# Altium PCB tuch-tara3.PcbDoc
Units mm, origin at the board's own origin, x right, y up, seen from the top; angles counter-clockwise.
Board outline 151 x 86.38 mm, 2 copper layers (Top Layer, Bottom Layer); 37 components, 22 nets, 99 pads, 9 vias.
Unrouted connection lines stored in the file: 8.
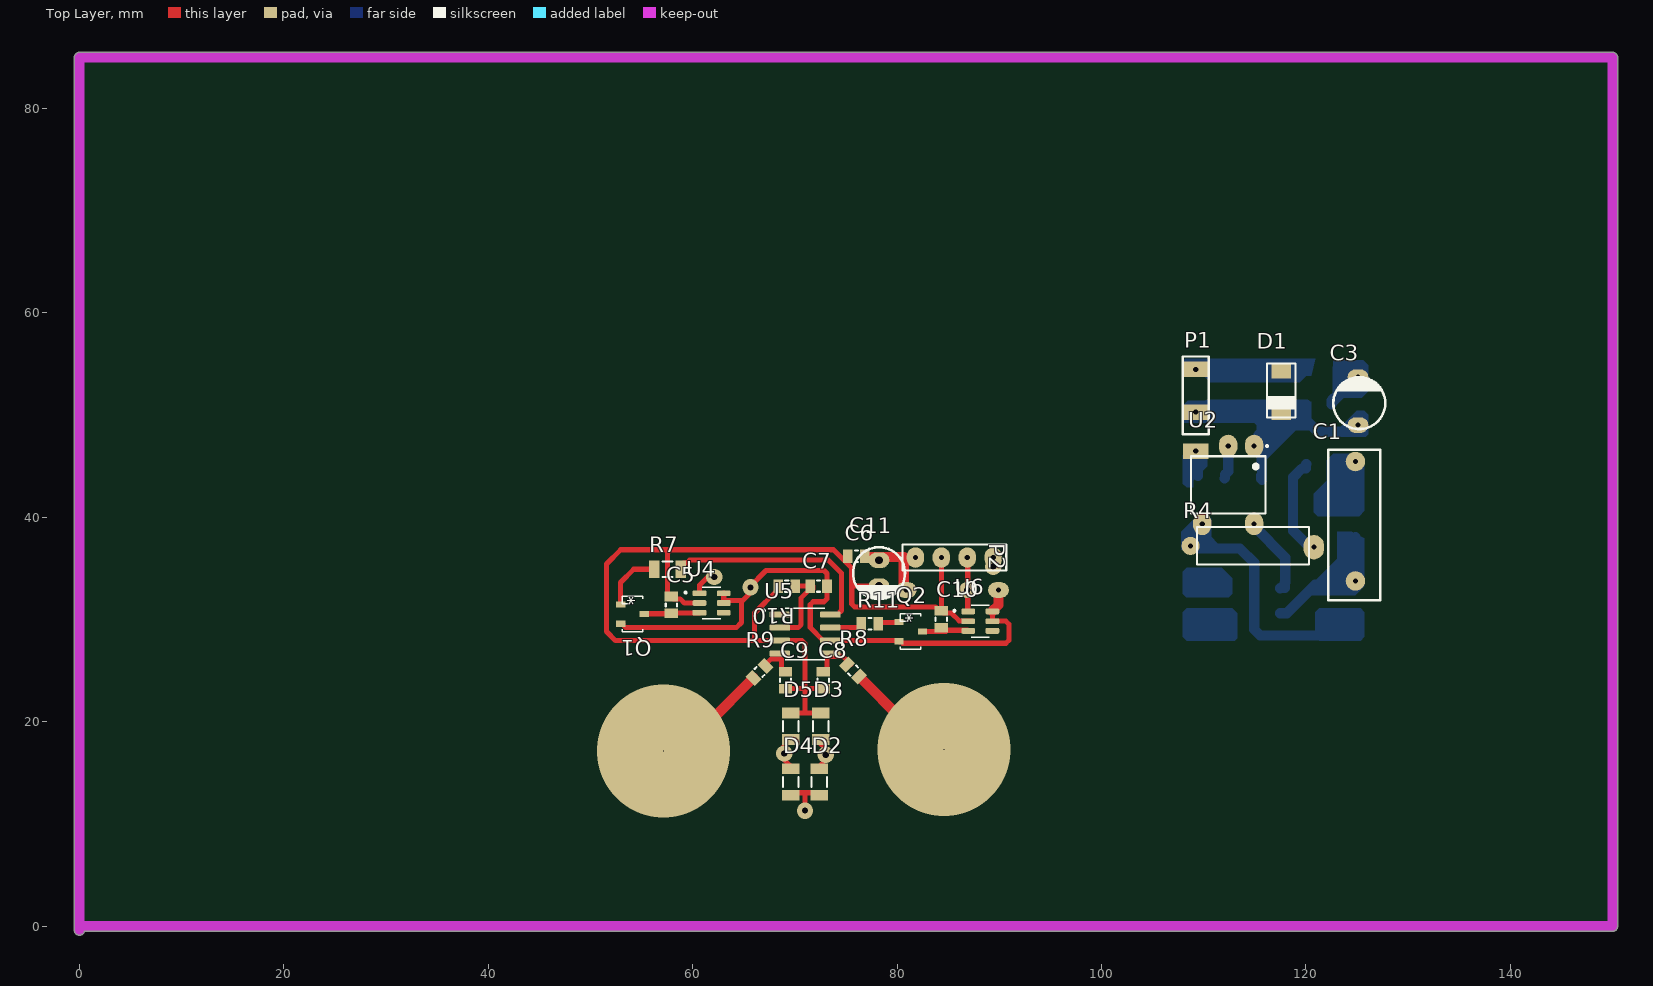
[diagram p0: Top Layer view]
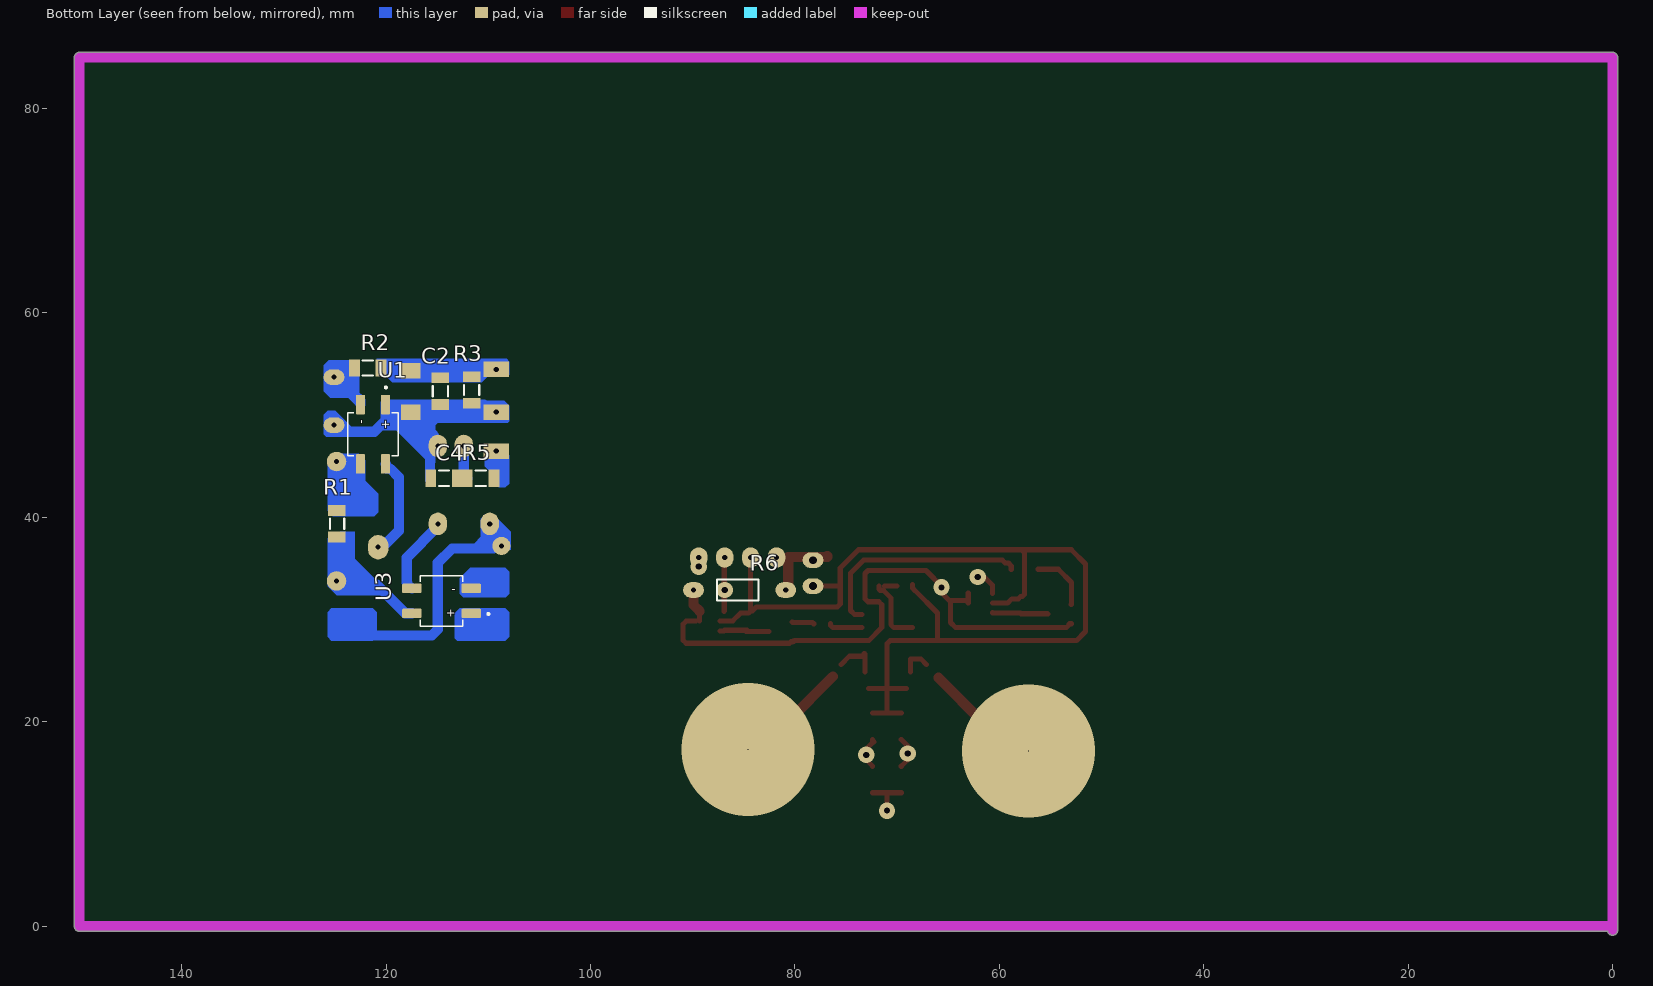
[diagram p1: Bottom Layer view, seen from below]
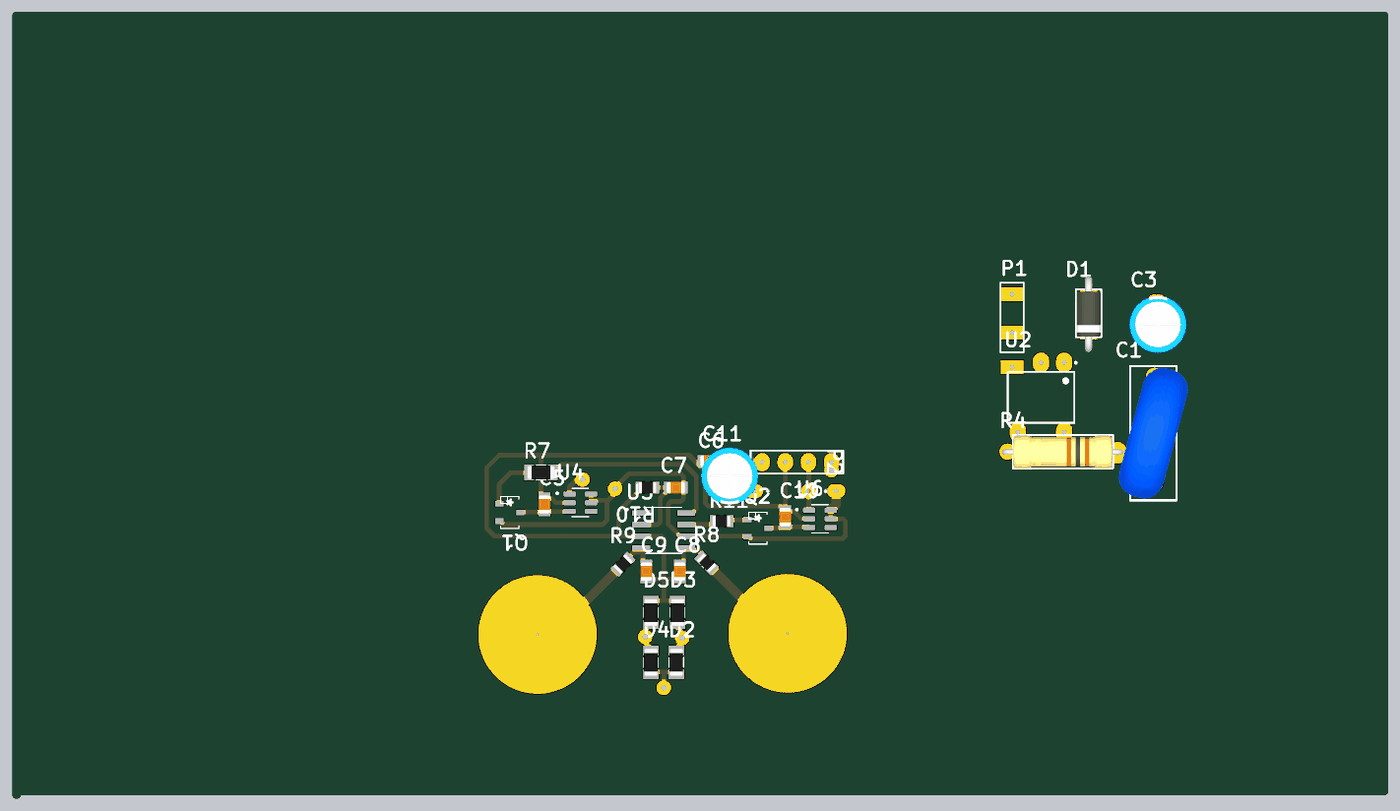
[diagram p2: 3D render of the assembled board from above, using the file's embedded part models]
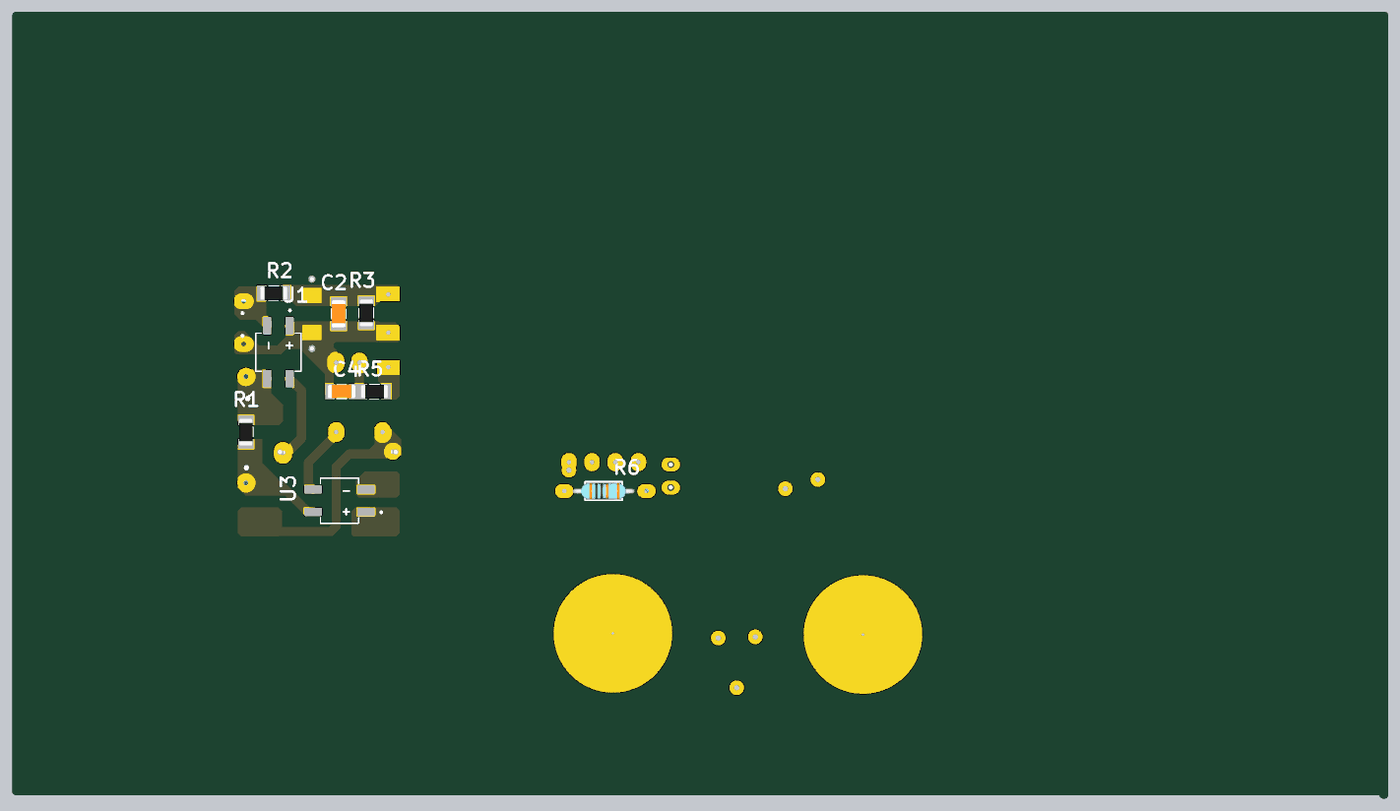
[diagram p3: 3D render of the assembled board from below, using the file's embedded part models]

## Layer stack, top to bottom
Top Solder: solder mask 0.0102, Solder Resist, Dk 3.5
Top Layer: signal copper 0.0356
Dielectric 1: dielectric 0.32, FR-4, Dk 4.8
Bottom Layer: signal copper 0.0356
Bottom Solder: solder mask 0.0102, Solder Resist, Dk 3.5

## Board outline
-0.5,-0.381 -0.5,85 cw(c0,85) 0,85.5 150,85.5 cw(c150,85) 150.5,85 150.5,0 cw(c150,0) 150,-0.5 0.486,-0.5 cw(c0,-0.381)

## Design rules (kind name [scope] priority, off if disabled: settings)
Clearance Clearance_1 [InPolygon] p1: gap=0.8 ignorepadtopadclearanceinfootprint=FALSE
Clearance [All] p2: gap=0.254 ignorepadtopadclearanceinfootprint=FALSE except(0: Arc-Hole Track-Hole SMDPad-Hole THPad-Hole Via-Hole Fill-Hole Poly-Hole Region-Hole Text-Hole)
PolygonConnect [All] p1: connectstyle=Relief reliefconductorwidth=0.254 reliefentries=4 polygonreliefangle="90 Angle" airgapwidth=0.254
RoomDefinition tuch-tara3 [InComponentClass('tuch-tara3')] p1: confinementstyle=ConfineIn formatcopy=TRUE lockcomponents=FALSE outline 144.907,-4.953 247.904,-4.953 247.904,23.114 144.907,23.114
RoutingLayers [All] p1: top layer_v5=FALSE bottom layer_v5=TRUE
RoutingVias [All] p1: holewidth=0.711 width=2.5 viastyle="Through Hole" minholewidth=0.711 minwidth=1.27 maxholewidth=0.711 maxwidth=2
SolderMaskExpansion [All] p1: expansion=0.102 istentingtop=FALSE
Width [All] p1: maxlimit=3 minlimit=0.5 preferedwidth=1
29 further rules are at their usual default settings.

## Components (designator, comment, footprint, x,y, rotation, side; value= is the part's Value field where it differs from the comment)
C1 "=Value" CAP-30 124.714,39.243 r90 top
C2 "=Value" "CAP 1206" 114.681,52.324 r90 bottom
C3 "=Value" ELEC-CAP-RAD10-20#1 125.222,51.181 r270 top
C4 "=Value" "CAP 1206" 114.3,43.815 r0 bottom
C5 "Cap Semi" "CAP 0805" 57.912,31.496 r90 top value=100pF
C6 "Cap Semi" "CAP 0805" 76.073,36.195 r0 top value=100pF
C7 "=Value" "CAP 0805" 72.39,33.274 r0 top
C8 "=Value" "CAP 0805" 72.771,24.003 r270 top
C9 "=Value" "CAP 0805" 69.088,24.003 r270 top
C10 "Cap Semi" "CAP 0805" 84.328,30.099 r90 top value=100pF
C11 "=Value" ELEC-CAP-RAD10-20#2 78.232,34.544 r90 top
D1 "MODEL" DO-41 117.602,56.134 r270 top
D2 "MODEL" "RES 1206 (3216X08L)" 72.39,14.097 r90 top
D3 "MODEL" "RES 1206 (3216X08L)" 72.517,19.558 r90 top
D4 "MODEL" "RES 1206 (3216X08L)" 69.596,14.097 r90 top
D5 "MODEL" "RES 1206 (3216X08L)" 69.596,19.558 r90 top
P1 "Header 3" HDR1X3 109.22,54.483 r270 top
P2 "Header 4" HDR1X4 81.788,36.068 r0 top
Q1 "2N3906" SOT23-3 54.109,31.811 r270 top
Q2 "2N3906" SOT23-3 81.332,30.099 r270 top
R1 "10K" "RES 1206 (3216X08L)" 124.841,39.37 r270 bottom
R2 "10K" "RES 1206 (3216X08L)" 121.793,54.61 r180 bottom
R3 "10K" "RES 1206 (3216X08L)" 111.633,52.451 r90 bottom
R4 "10K" Res-(1/1) 121.158,37.211 r180 top
R5 "10K" "RES 1206 (3216X08L)" 110.744,43.815 r0 bottom
R6 "10K" Res-(1/4) 85.598,32.893 r180 bottom
R7 "10K" "RES 1206 (3216X08L)" 57.531,34.925 r180 top
R8 "10K" "RES 0805 (2012X06L)" 75.692,25.019 r135 top
R9 "10K" "RES 0805 (2012X06L)" 66.548,24.892 r45 top
R10 "10K" "RES 0805 (2012X06L)" 69.215,33.274 r0 top
R11 "10K" "RES 0805 (2012X06L)" 77.343,29.591 r0 top
U1 "MB6S" SOIC245P670X270-4N 121.285,48.133 r270 bottom
U2 "K3021P" DIP762W50P254L730H410Q6 112.395,43.18 r270 top
U3 "MB6S" SOIC245P670X270-4N 114.575,31.832 r0 bottom
U4 "TTP223_" SOT95P285X126-6N 61.849,31.623 r0 top
U5 "LM555CM/NOPB" SOIC127P599X175-8N 70.993,28.575 r0 top
U6 "TTP223_" SOT95P285X126-6N 88.138,29.845 r0 top

## Footprints (in the part's own frame and the unit in brackets; to place one, negate y for a bottom-side part, rotate by r counter-clockwise, add the part's x,y. Pads: shape width x height; smd on the part's side, far side on the other; paste and mask are expansions set on the pad)
"CAP 0805" [mm]
  rect 0.95x1.3 smd: 1(-0.889,0) 2(0.761,0)
  silkscreen extent -0.21,-0.55 0.09,0.55, body extent -1.08,-0.63 0.95,0.63, height 0.65
"CAP 1206" [mm]
  rect 1.05x1.7 smd: 1(-1.27,0) 2(1.326,0)
  silkscreen extent -0.47,-0.75 0.53,0.75, body extent -1.49,-0.77 1.55,0.75, height 0.75
CAP-30 [mil]
  round 75 hole 19.68: 1(-215,-5) 2(245,-5)
  silkscreen extent -290,-100 290,100, body extent -301,-169 301,169, height 707
DIP762W50P254L730H410Q6 [mm]
  oval 2.2x1.79 hole 0.5: 1(-3.81,2.54) 2(-3.81,0) 4(3.81,-2.54) 6(3.81,2.54)
  silkscreen extent -3.9,-3.65 2.8,3.9
DO-41 [mm]
  rect 1.5x1.905 all layers, no hole: 1(1.778,0) 2(5.842,0)
  silkscreen extent 1.1,-1.5 6.35,1.5, body extent -0.41,-1.33 8,1.33, height 3.33
ELEC-CAP-RAD10-20#1 [mil]
  oval 60x80 hole 19.68: 1(-100,-5) 2(84.65,-5)
  silkscreen extent -100,-100 100,100, body extent -124,-124 124,124, height 404
ELEC-CAP-RAD10-20#2 [mil]
  oval 60x80 hole 30: 1(-50,0) 2(50,0)
  silkscreen extent -100,-100 100,100, body extent -124,-124 124,124, height 404
HDR1X3 [mm] "Connector; Header; 3 Position"
  rect 1.524x2.5 hole 0.5: 1(0,0) 2(8.001,0) 3(4.191,0)
  silkscreen extent -1.27,-1.27 6.35,1.27
HDR1X4 [mm] "Connector; Header; 4 Position"
  oval 1.7x2 hole 0.5: 1(0,0) 2(2.54,0) 3(5.08,0) 4(7.62,0)
  silkscreen extent -1.27,-1.27 8.89,1.27
"RES 0805 (2012X06L)" [mm] "Chip Resistor, 2-Leads, Body 2.0x1.3mm, IPC High Density _ (0.100 W)"
  rect 0.95x1.3 smd: 1(-0.838,0) 2(0.812,0)
  silkscreen extent -0.16,-0.55 0.14,0.55, body extent -1.03,-0.63 1,0.64, height 0.6
"RES 1206 (3216X08L)" [mm] "Chip Resistor, 2-Leads, Body 3.2x1.6mm, IPC High Density _ (0.125 W)"
  rect 1.05x1.7 smd: 1(-1.295,0) 2(1.301,0)
  silkscreen extent -0.5,-0.75 0.5,0.75, body extent -1.52,-0.76 1.53,0.76, height 0.6
Res-(1/1) [mil]
  oval 78.74x94.49 hole 19.68: 1(15,5)
  round 70 hole 19.68: 2(490,0)
  silkscreen extent 34,-72 466,72, body extent -11,-71 514,73, height 151
Res-(1/4) [mil]
  oval 80x60 hole 19.68: 1(-170,0) 2(185,0)
  silkscreen extent -80,-40 80,40, body extent -135,-36 135,36, height 115
SOIC127P599X175-8N [mm]
  rrect25% 1.97x0.6 smd: 1(-2.47,1.905) 2(-2.47,0.635) 3(-2.47,-0.635) 4(-2.47,-1.905) 5(2.47,-1.905) 6(2.47,-0.635) 7(2.47,0.635) 8(2.47,1.905)
  silkscreen extent -4.14,-2.52 1.95,2.52
SOIC245P670X270-4N [mm]
  rrect23% 1.91x0.91 smd: 1(-2.9,1.225) 2(-2.9,-1.225) 3(2.9,-1.225) 4(2.9,1.225)
  silkscreen extent -4.68,-2.48 2.1,2.48
SOT23-3 [mm]
  rect 0.6x0.9 smd: 1(0.32,-1.15) 2(2.22,-1.15) 3(1.27,1.15)
  silkscreen extent -0.48,-1 3.02,1
SOT95P285X126-6N [mm]
  rrect50% 1.35x0.57 smd: 1(-1.185,0.95) 2(-1.185,0) 3(-1.185,-0.95) 4(1.185,-0.95) 5(1.185,0) 6(1.185,0.95)
  silkscreen extent -2.64,-1.56 0.9,1.56

## Part data
C1 C2 C4 C7 C8 C9: library part Capacitor, "Capacitor"
C3 C11: library part "Capacitor Electrolytic", "Electrolytic Capacitor"
C5 C6 C10: "Capacitor (Semiconductor SIM Model)", LatestRevisionDate=29-May-2009, LatestRevisionNote="IPC-7351 Footprint Added.", PackageDescription="Chip Capacitor", PackageReference=C1206, Published=8-Jun-2000, Publisher="Altium Limited"
D1: library part Diode, "Diode", MODEL=1N4148
D2 D3 D4 D5: library part "LED 5mm", "Typical LED", COLOR=RED
P1: "Header, 3-Pin", LatestRevisionDate=17-Jul-2002, LatestRevisionNote="Re-released for DXP Platform.", Publisher="Altium Limited"
P2: "Header, 4-Pin", LatestRevisionDate=17-Jul-2002, LatestRevisionNote="Re-released for DXP Platform.", Publisher="Altium Limited"
Q1 Q2: "PNP General Purpose Amplifier", ComponentLink1Description="Manufacturer Link", ComponentLink1URL=http://www.fairchildsemi.com/, ComponentLink2Description=Datasheet, ComponentLink2URL=http://www.fairchildsemi.com/ds/2N%2F2N3906.pdf, DatasheetVersion=1997, LatestRevisionDate=15-Jan-2003, LatestRevisionNote="PCB Footprint 'BCY-W3/D4.7' replaced", PackageDescription="TO, Flat Index; 3 In-Line, Axial Leads; Body Dia. 4.5mm; Leads 0.51 x 0.48 mm (max)", PackageReference=TO-92A, PackageVersion=Sep-1998, Published=8-Jun-2000, Publisher="Altium Limited"
R1 R2 R3 R4 R5 R6 R7 R8 R9 R10 R11: library part Resistor, "Resistor", Power="1/4 W", Tolerance=5%
U1 U3: "Bridge Rectifier Single Phase Standard 600V Surface Mount 4-SOIC", Package="BESOP-4 Surge Components", Digi-Key_Part_Number=MB6SCT-ND, Digi-Key_Purchase_URL=https://www.digikey.com.tr/product-detail/en/on-semiconductor/MB6S/MB6SCT-ND/965654?utm_source=snapeda&utm_medium=aggregator&utm_campaign=symbol, MF="ON Semiconductor", MP=MB6S, SnapEDA_Link=https://www.snapeda.com/parts/MB6S/ON%20Semiconductor/view-part/2774209/?ref=snap
U2: "Optoisolator Triac Output 5300Vrms 1 Channel 6-DIP", Package="DIP-6 Vishay", Availability=Unavailable, DigiKey-Purchase-URL=https://snapeda.com/shop?store=DigiKey&id=291595, MF="Vishay Semiconductor", Mouser-Purchase-URL=https://snapeda.com/shop?store=Mouser&id=291595, MP=K3021P, Price=None, SnapEDA_Link=https://www.snapeda.com/parts/K3021P/Vishay%20Semiconductor%20Opto%20Division/view-part/291595/?ref=snap
U4 U6: "22 kOhms Â±5% 0.1W, 1/10W Chip Resistor 0402 _1005 Metric_ Automotive AEC-Q200, Moisture Resistant Thick Film", Package="0402 KOA Speer", Availability=Unavailable, MF="KOA Speer", MP=TTP223, Price=None, SnapEDA_Link=https://www.snapeda.com/parts/TTP223%20/KOA%20Speer/view-part/2780209/?ref=snap
U5: "Highly Stable 555 Timer 8-SOIC 0 to 70", Package=None, Availability=Unavailable, MP=LM555CM/NOPB, Price=None

## Via types
v1: diameter 1.6, hole 0.6, Top Layer to Bottom Layer, 7 vias
v2: diameter 13, hole 0, Top Layer to Bottom Layer, 2 vias

## Nets (pads, with @x,y where several pads share a name; then routed paths per layer and width w, separated by ;. In a path a pad name is that pad's centre, name@x,y a point inside that pad or via, vN(x,y) a via of type N, cw(c..) or ccw(c..) an arc to the next point about the centre after c; other vN are vias at no path point)
faz: R4.2 U2.4 | length 25.5
  Bottom Layer w1: R4.2 108.861,37.062 109.411,37.062 109.516,36.957 113.538,36.957 114.935,35.56 114.935,29.034 115.521,28.448 124.956,28.448 ; R4.2@108.861,37.957 109.855,38.951 U2.4
GND: C2.2 C5.2 C6.1 C8.2 C9.2 C10.2 C11.1 D1.1 D3.2 D5.2 P1.1 P2.2 R2.2 R3.2 R10.1 U4.2 U5.3 U6.2 | length 115.7
  Top Layer w0.5: U4.2 59.182,31.623 58.773,32.032 58.137,32.032 C5.2 57.756,32.257 57.531,32.482 57.531,36.537 57.824,36.83 ; R10.1@68.498,33.446 68.498,33.094 68.279,32.874 66.04,30.635 66.04,27.94 ; C9.2 70.929,23.242 ; D5.2 70.993,20.859 ; D3.2@72.39,20.859 70.993,20.859 ; C8.2 70.993,23.242 ; C11.1 75.565,33.274 ; P2.2 84.328,31.035 C10.2@84.153,30.86 ; U6.2@87.334,29.845 87.299,29.88 86.071,29.88 85.302,30.649 84.539,30.649 C10.2 C10.2@84.153,30.86 ; 57.824,36.83 58.166,36.83 73.787,36.83 75.565,35.052 75.565,33.274 ; 57.824,36.83 52.959,36.83 51.562,35.433 51.562,28.829 52.451,27.94 66.04,27.94 ; 66.04,27.94 U5.3 70.7,27.94 70.993,27.647 70.993,23.242 ; 70.993,20.859 70.993,23.242 ; 75.565,33.274 75.565,31.535 75.858,31.242 83.771,31.242 C10.2@84.153,30.86
  Bottom Layer w1: P1.1@109.22,54.61 112.395,54.61 ; R3.2 119.149,53.752 120.134,54.737 R2.2@120.138,54.733 ; D1.1@117.475,54.737 D1.1@117.602,54.737
NetC1_2: C1.2 R1.1 U1.3 | length 7.3
  Bottom Layer w1: U1.3 122.51,45.304 122.555,45.35 124.725,45.35 C1.2 R1.1
NetC3_1: C3.1 R2.1 U1.2 | length 6.4
  Bottom Layer w1: U1.2 122.51,51.443 123.088,52.021 R2.1 123.088,54.285 123.113,54.26 123.438,54.26 123.877,53.821 124.995,53.821 C3.1
NetC4_1: C4.1 R5.2 U2.2 | length 3.3
  Bottom Layer w1: R5.2 112.07,43.84 112.07,44.165 112.395,44.49 U2.2
NetC5_1: C5.1 Q1.3 U4.3 | length 5.5
  Top Layer w0.5: Q1.3 55.292,30.574 57.879,30.574 C5.1 57.945,30.64 60.631,30.64 U4.3
NetC6_2: C6.2 C11.2 P2.1 R6.2 | length 7.5
  Top Layer w1: C6.2 76.834,36.157 76.859,36.131 80.645,36.131 80.645,33.135 80.887,32.893 R6.2
  Bottom Layer w1: R6.2@80.899,32.639 R6.2
NetC7_1: C7.1 R10.2 U5.2 | length 7.9
  Top Layer w0.5: U5.2 70.319,29.21 70.612,29.503 70.612,32.131 71.355,32.874 71.657,32.874 71.761,32.978 C7.1@71.761,33.28 ; R10.2 C7.1@71.247,33.274
NetC8_1: C8.1 R8.2 U5.5 | length 4.5
  Top Layer w0.5: C8.1@73.152,24.892 U5.5@73.152,26.416 ; U5.5@73.209,26.67 73.202,26.67 73.152,26.62 U5.5@73.152,26.416 ; R8.2@75.499,25.593 74.676,26.416 U5.5@73.152,26.416
NetC9_1: C9.1 R9.2 U5.4 | length 3.1
  Top Layer w0.5: R9.2@67.122,25.593 67.691,26.162 68.707,26.162 C9.1@68.707,24.892
NetC10_1: C10.1 Q2.3 U6.3 | length 4.9
  Top Layer w0.5: Q2.3@82.557,28.829 C10.1@84.764,28.829 ; C10.1@84.709,28.956 86.883,28.956 86.944,28.895 U6.3@87.334,28.895
NetQ1_2: Q1.1 R7.2 | length 6
  Top Layer w0.5: 52.928,33.624 52.944,33.64 ; Q1.1 52.944,31.506 52.944,33.64 ; R7.2 54.229,34.925 52.944,33.64
NetQ2_2: Q2.1 R11.2 | length 2.2
  Top Layer w0.5: R11.2 78.293,29.729 80.207,29.729 Q2.1@80.257,29.779
NetR4_1: R4.1 U1.4 | length 10.4
  Bottom Layer w1: U1.4 120.015,45.188 120.015,44.778 119.605,44.778 118.745,43.918 118.745,38.692 120.777,36.66 R4.1@120.777,36.449
NetR7_1: R7.1 U5.8 | length 21.7
  Top Layer w0.5: R7.1 58.826,35.25 59.101,35.525 59.426,35.525 59.715,35.814 73.279,35.814 74.549,34.544 74.549,30.881 74.148,30.48 U5.8
NetR11_1: R11.1 U5.7 | length 3.3
  Top Layer w0.5: U5.7 76.28,29.21 76.505,29.435 R11.1
NetU2_6: U2.6 U3.3 | length 8
  Bottom Layer w1: U2.6 114.935,39.116 117.983,36.068 117.983,33.643 117.93,33.59 117.93,33.102 117.52,33.102 U3.3
nol: C1.1 R1.2 U3.4 | length 13
  Bottom Layer w1: U3.4 117.486,30.618 118.121,30.618 120.904,33.401 123.82,33.401 124.028,33.609 124.668,33.609 C1.1 R1.2
o1: D2.2 D3.1 P1.2 P2.4 R5.1 U4.1 | length 8.4
  Top Layer w0.5: U4.1 60.664,33.359 61.468,34.163 v1(62.103,34.163) ; D2.2@72.39,15.652 73.025,16.287 v1(73.025,16.764) 73.025,17.353 72.344,18.034 72.263,18.034 72.39,18.161 D3.1@72.39,18.263
  Bottom Layer w1: P1.2 109.22,44.623 109.449,44.394 R5.1@109.449,44.069
  other v1: 89.408,35.179
o2: D4.2 D5.1 P2.3 U3.1 U6.1 | length 8.4
  Top Layer w0.5: D4.2@69.596,15.652 68.961,16.287 v1(68.961,16.891) 68.961,17.628 D5.1 ; P2.3 86.91,36.026 86.91,30.83 86.946,30.795 U6.1
  other v1: 86.868,32.893
oo1: U3.2
VCC: C2.1 C3.2 C4.2 C7.2 D1.2 D2.1 D4.1 P1.3 Q1.2 Q2.2 R3.1 R6.1 U1.1 U2.1 U4.5 U4.6 U5.6 U6.5 U6.6 | length 100
  Top Layer w0.5: Q1.2 53.109,29.591 53.159,29.541 53.159,29.503 53.452,29.21 64.262,29.21 64.77,29.718 64.77,31.877 63.255,31.877 63.034,32.098 ; U4.5 63.034,32.098 ; U4.6 63.034,32.098 ; 64.77,31.75 65.449,32.429 65.449,32.937 v1(65.659,33.147) ; v1@65.596,33.21 67.183,34.798 72.859,34.798 73.152,34.505 73.152,32.043 72.859,31.75 71.794,31.75 71.501,31.457 71.501,29.217 72.778,27.94 U5.6 80.046,27.94 80.107,27.879 Q2.2 80.232,27.829 80.382,27.829 80.525,27.686 90.639,27.686 90.932,27.979 90.932,29.552 90.639,29.845 U6.5@89.704,29.845 ; D4.1@69.596,13.056 70.993,13.056 ; v1(70.993,11.303) 70.993,13.056 ; D2.1@72.39,13.056 70.993,13.056 ; U6.5 89.323,30.353
  Top Layer w1: U6.6 89.323,30.835 89.916,31.428 R6.1
  Bottom Layer w1: P1.3 P1.3@109.708,50.292 ; U2.1@114.935,47.143 114.935,47.409 115.33,47.804 115.33,48.02 D1.2@117.094,49.784 ; C4.2@115.626,44.069 C4.2 115.626,43.759 115.697,43.688 115.697,46.99 116.205,47.498 ; D1.2@117.602,50.038 119.507,50.038 121.158,48.387 124.055,48.387 124.699,49.031 C3.2 ; D1.2 117.352,50.042 116.835,50.042 116.831,50.038 115.062,50.038 114.808,50.292 P1.3@109.708,50.292 ; U1.1 110.449,51.033 P1.3@109.708,50.292
pads on no net: R8.1 R9.1 U4.4 U5.1 U6.4
copper on no net: | length 12.5
  Top Layer w1: v2@61.522,19.866 65.955,24.299 ; 76.285,24.426 v2@80.709,20.002
  other v2: 57.15,17.145 84.582,17.272

## Polygon pours and split planes (outlines as drawn)
GND on Bottom Layer "GND_L02_P002" (solid, pour order 2): 116.332,39.751
no net on Bottom Layer "NONET_L02_P000" (solid, pour order 0): 91.059,37.973

## Keep-outs
Keep-Out Layer:
  lines w1: 0,-0.381 0,85 150,85 150,0 0,0

## Other copper
Bottom Layer:
  region net faz: 121.285,31.115 120.904,30.734 120.904,28.321 121.285,27.94 125.349,27.94 125.73,28.321 125.73,30.734 125.349,31.115
  region net faz: 107.823,36.83 107.823,38.608 109.474,40.259 110.363,40.259 110.744,39.878 110.744,38.1 111.887,36.83
  region net o1: 110.363,45.847 110.363,44.983 108.966,43.586 108.966,42.926 108.331,42.926 107.95,43.307 107.95,46.101
  region net oo1: 107.95,34.671 108.331,35.052 111.76,35.052 112.776,34.036 112.776,32.512 112.459,32.195 108.268,32.195 107.95,32.512
  region net o2: 113.284,30.607 112.776,31.115 108.331,31.115 107.95,30.734 107.95,28.321 108.331,27.94 113.03,27.94 113.284,28.194
  region net nol: 124.46,38.608 123.063,38.608 123.063,37.211 123.063,35.941 120.215,33.093 120.332,32.385 124.841,32.385 125.73,33.274 125.73,37.973
  region net NetC1_2: 122.682,46.228 124.587,46.228 125.73,45.085 125.73,40.64 125.222,40.132 121.158,40.132 120.777,40.513 120.777,42.291 122.047,43.561 122.047,45.593
  region net VCC: 123.317,48.768 124.968,50.419 125.73,50.419 126.111,50.038 126.111,48.133 125.857,47.879 122.174,47.879
  region net NetC3_1: 122.682,55.372 125.603,55.372 126.111,54.864 126.111,52.324 125.476,51.689 123.698,51.689 122.682,50.673
  region net VCC: 119.507,51.435 108.458,51.435 107.95,50.927 107.95,49.403 108.077,49.276 114.935,49.276 115.189,49.022 115.189,45.339 115.824,45.339 118.999,48.514 120.777,48.514 120.777,49.149 120.523,49.403 120.523,51.308
  region net GND: 120.904,55.499 108.204,55.499 107.95,55.245 107.95,53.975 108.077,53.848 109.982,53.848 110.617,53.213 119.38,53.213 120.015,53.848 120.523,53.848
  region: 122.936,50.292
  region: 123.444,44.45

## Text inside footprints (layer, text, board x,y; h text height)
Q1: Top Overlay "*" at 53.109,32.291 h1.27 r270
Q2: Top Overlay "*" at 80.332,30.579 h1.27 r270
U1: Bottom Overlay "+" at 120.395,49.532 h0.81 r90; Bottom Overlay "-" at 122.685,49.533 h0.81 r90
U3: Bottom Overlay "-" at 113.175,33.232 h0.81 r180; Bottom Overlay "+" at 113.176,30.942 h0.81 r180